# Altium PCB MB1136.PcbDoc (part 2 of 2)
Units mm, origin at the board's own origin, x right, y up, seen from the top; angles counter-clockwise.
Board outline 70 x 83 mm, 2 copper layers (Top Layer, Bottom Layer), stack 1.571 mm thick; 176 components, 154 nets, 599 pads, 425 vias.
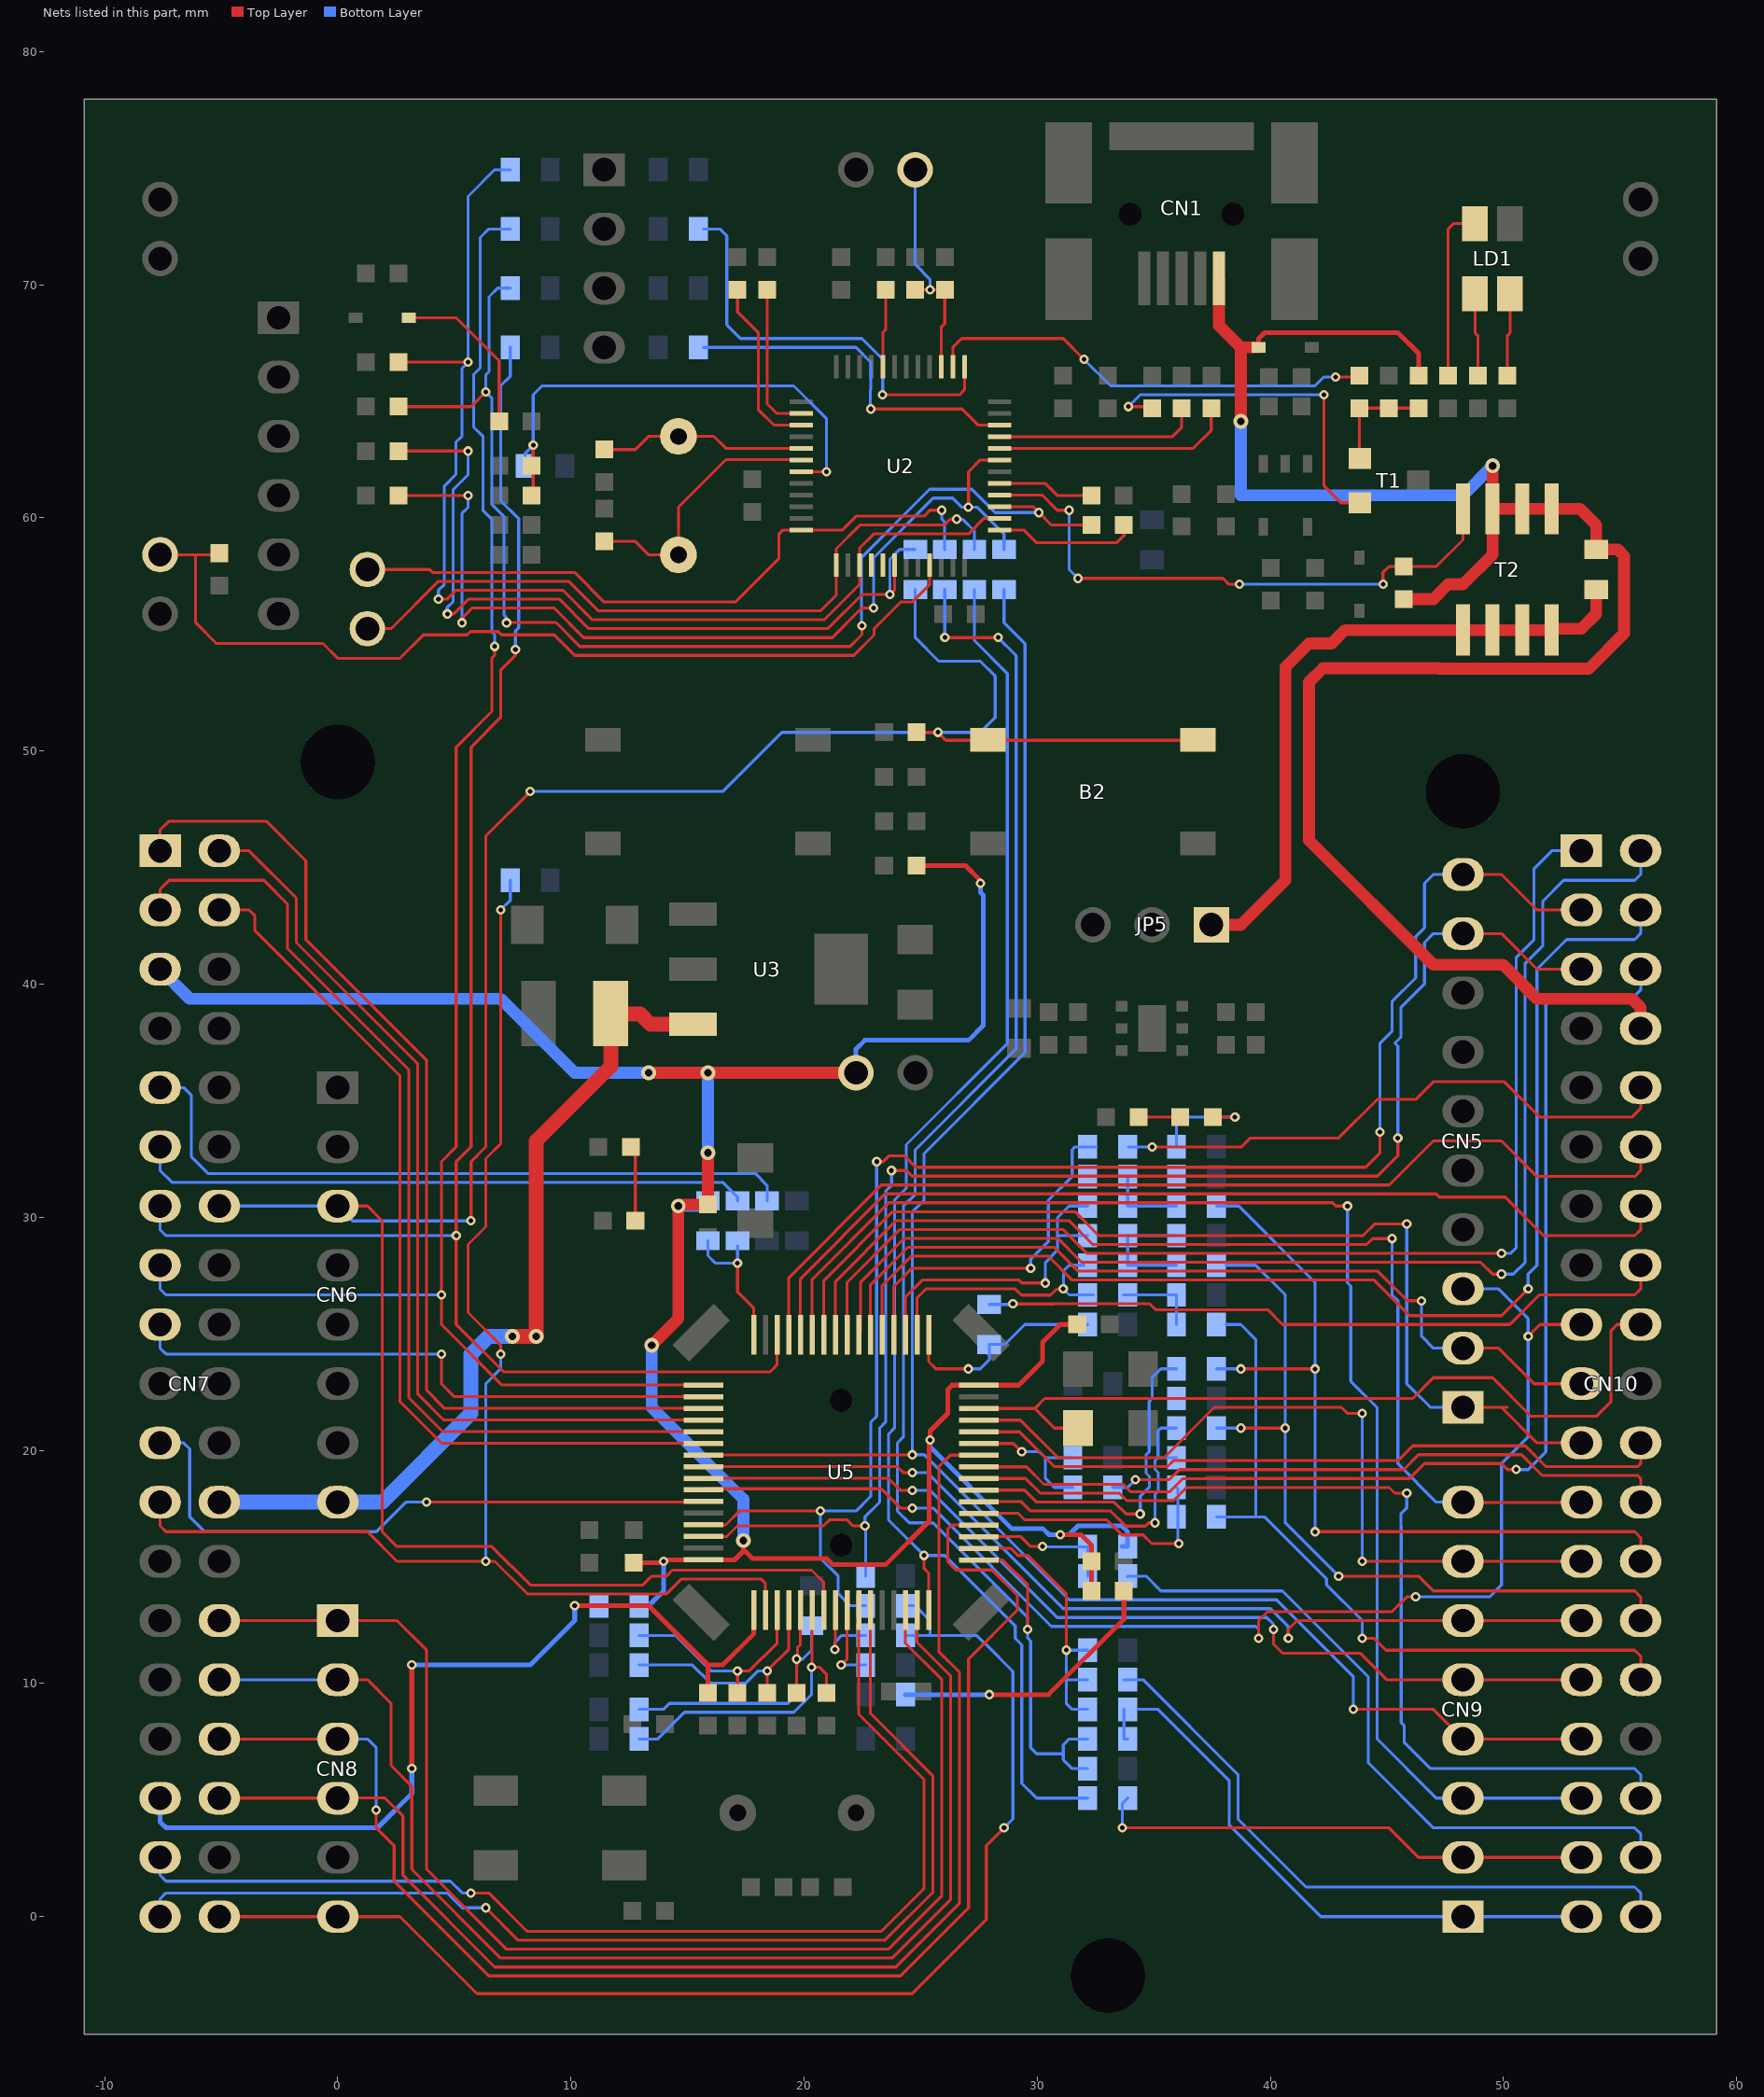
[diagram p2: the nets of this part, all layers, seen from the top]

## Via types
v1: diameter 0.406, hole 0.203, Top Layer to Bottom Layer, tented both sides, 399 vias
v2: diameter 0.635, hole 0.33, Top Layer to Bottom Layer, tented both sides, 26 vias

## Nets (pads, with @x,y where several pads share a name; then routed paths per layer and width w, separated by ;. In a path a pad name is that pad's centre, name@x,y a point inside that pad or via, vN(x,y) a via of type N, cw(c..) or ccw(c..) an arc to the next point about the centre after c; other vN are vias at no path point) (continued)
NetCN7_38: CN7.38 CN8.6 SB51.2 SB52.1 | length 53.9
  Top Layer w0.127: CN7.38@-5.08,0 CN8.6@0,0 2.667,0 5.969,-3.302 24.638,-3.302 27.813,-0.127 27.813,3.048 v1(28.575,3.81)
  Bottom Layer w0.127: SB51.2@24.352,12.065 25.4,12.065 ; SB52.1@24.352,13.335 24.765,13.335 25.4,12.7 25.4,12.065 ; v1(28.575,3.81) 28.956,4.191 28.956,10.515 27.787,11.684 27.782,11.684 27.401,12.065 25.4,12.065
NetCN10_26: CN10.26 SB25.2 SB36.2 | length 35.6
  Top Layer w0.127: v1(38.735,23.495) v1(41.91,23.495) ; v1(41.91,16.51) 55.626,16.51 55.88,16.256 CN10.26@55.88,15.24
  Bottom Layer w0.127: SB36.2@37.687,23.495 v1(38.735,23.495) ; SB25.2@37.687,30.48 38.639,30.48 41.91,27.209 v1(41.91,23.495) v1(41.91,16.51)
NetCN10_28: CN10.28 SB28.2 SB39.2 | length 33.4
  Top Layer w0.127: v1(38.735,20.955) v1(40.64,20.955) ; v1(42.926,14.605) 46.355,14.605 46.99,13.97 55.626,13.97 55.88,13.716 CN10.28@55.88,12.7
  Bottom Layer w0.127: SB39.2@37.687,20.955 v1(38.735,20.955) ; 38.1,27.94 39.37,27.94 40.64,26.67 v1(40.64,20.955) 40.64,16.891 v1(42.926,14.605)
NetCN10_30: CN10.30 SB35.1 SB44.1 | length 31.4
  Top Layer w0.127: v1(43.942,11.938) 44.45,11.938 44.958,11.43 55.626,11.43 55.88,11.176 CN10.30@55.88,10.16
  Bottom Layer w0.127: SB44.1@37.687,17.145 39.37,17.145 ; 38.1,25.4 38.735,25.4 39.37,24.765 39.37,17.145 ; v1(43.942,11.938) 43.942,12.7 42.405,14.237 42.405,14.491 39.751,17.145 39.37,17.145
NetD1_2: D1.2 R9.1 | length 7.2
  Top Layer w0.127: D1.2@3.048,68.58 5.08,68.58 6.921,66.739 R9.1@6.921,64.135
NetJP1_2: JP1.2 R4.1 R7.2 U2.39 | length 10
  Top Layer w0.127: R4.1@24.765,69.787 v1(25.4,69.787) R7.2@26.035,69.787 26.035,68.326 25.88,68.171 U2.39@25.88,66.48
  Bottom Layer w0.127: JP1.2@24.765,74.93 24.765,70.866 25.4,70.231 v1(25.4,69.787)
NetJP4_2: JP4.2 R26.2 U2.21 | length 40.8
  Top Layer w0.127: JP4.2@-7.62,58.42 -6.096,58.42 ; R26.2@-5.08,58.483 -5.143,58.42 -6.096,58.42 ; U2.21@25.38,57.98 25.38,57.13 24.638,56.388 24.143,56.388 23,55.245 23,54.973 22.129,54.102 10.16,54.102 9.284,54.978 7.023,54.978 6.884,55.118 5.689,55.118 5.55,54.978 3.67,54.978 2.667,53.975 0,53.975 -0.635,54.61 -5.207,54.61 -6.096,55.499 -6.096,58.42
NetJP5_1: JP5.1 SB1.2 T2.5 T2.6 T2.7 T2.8 | length 28.2
  Top Layer w0.508: JP5.1@37.465,42.545 38.735,42.545 40.64,44.45 40.64,53.594 41.656,54.61 42.627,54.61 43.202,55.185 T2.5@48.26,55.185 T2.6@49.53,55.185 T2.7@50.8,55.185 T2.8@52.07,55.185 52.13,55.245 53.34,55.245 53.975,55.88 SB1.2@53.975,56.737
NetL1_2: L1.2 SB57.1 | length 11.9
  Top Layer w0.203: v1(27.94,9.525) 30.48,9.525 33.719,12.763 L1.2@33.719,13.97
  Bottom Layer w0.203: SB57.1@24.352,9.525 v1(27.94,9.525)
NetLD1_2: LD1.2 R21.2 | length 3.6
  Top Layer w0.127: R21.2@50.165,66.103 50.165,67.818 50.28,67.933 LD1.2@50.28,69.62
NetLD1_3: LD1.3 R20.2 | length 3.6
  Top Layer w0.127: LD1.3@48.78,69.62 48.78,67.933 48.895,67.818 R20.2@48.895,66.103
NetLD1_4: LD1.4 R19.1 | length 7.5
  Top Layer w0.127: R19.1@47.625,66.103 47.625,72.39 47.855,72.62 LD1.4@48.78,72.62
NetLD2_1: LD2.1 R31.2 | length 1.8
  Top Layer w0.127: LD2.1@34.354,34.29 R31.2@36.132,34.29
NetLD3_1: LD3.1 R32.1 | length 3.3
  Top Layer w0.127: LD3.1@12.573,33.02 12.763,32.829 R32.1@12.763,29.845
NetR2_2: R2.2 U2.3 | length 7.6
  Top Layer w0.127: R2.2@17.145,69.787 17.145,68.834 18.034,67.945 18.034,64.643 18.697,63.98 U2.3@19.88,63.98
NetR3_2: R3.2 U2.2 | length 6.5
  Top Layer w0.127: R3.2@18.415,69.787 18.415,64.897 18.832,64.48 U2.2@19.88,64.48
NetR6_2: R6.2 U2.44 | length 3.4
  Top Layer w0.127: U2.44@23.38,66.48 23.38,67.957 23.495,68.072 R6.2@23.495,69.787
NetR10_2: R10.2 R11.1 R12.1 T1.2 | length 4.7
  Top Layer w0.127: T1.2@43.835,62.545 43.815,62.565 R11.1@43.815,64.706 R10.2@45.085,64.706 R12.1@46.355,64.706
NetR16_2: R16.2 T1.1 | length 15.4
  Top Layer w0.127: v1(33.909,64.77) 34.862,64.77 R16.2@34.925,64.706 ; v1(42.291,65.278) 42.291,61.387 43.033,60.645 T1.1@43.835,60.645
  Bottom Layer w0.127: v1(33.909,64.77) 34.417,65.278 v1(42.291,65.278)
NetR25_1: R25.1 U2.29 | length 4.2
  Top Layer w0.127: U2.29@28.38,61.48 30.341,61.48 30.861,60.96 R25.1@32.322,60.96
NetR28_2: R28.2 T2.4 U2.28 | length 25.4
  Top Layer w0.127: U2.28@28.38,60.98 30.206,60.98 30.861,60.325 v1(31.369,60.325) ; v1(31.75,57.404) 37.973,57.404 38.227,57.15 v1(38.672,57.15) ; v1(44.831,57.15) 44.831,57.658 45.085,57.912 R28.2@45.72,57.912 47.117,57.912 48.26,59.055 T2.4@48.26,60.385
  Bottom Layer w0.127: v1(31.369,60.325) 31.369,57.785 v1(31.75,57.404) ; v1(38.672,57.15) v1(44.831,57.15)
NetR31_1: R31.1 SB21.1 | length 4.5
  Top Layer w0.127: R31.1@37.529,34.29 v1(38.481,34.29)
  Bottom Layer w0.127: SB21.1@35.973,33.02 35.973,33.941 36.322,34.29 v1(38.481,34.29)
NetSB13_1: SB13.1 SB63.2 U5.16 | length 62.3
  Top Layer w0.127: v1(25.146,15.494) 25.146,14.929 25.343,14.732 U5.16@25.343,13.149
  Bottom Layer w0.127: SB13.1@27.305,56.928 27.305,54.737 28.715,53.327 28.715,37.447 24.384,33.116 24.384,31.242 23.876,30.734 23.876,20.955 23.622,20.701 23.622,17.018 v1(25.146,15.494) 26.035,15.494 29.057,12.472 29.057,11.938 29.337,11.658 29.337,5.715 29.972,5.08 SB63.2@32.163,5.08
NetSB14_1: SB14.1 SB61.2 SB62.2 U5.17 | length 66.3
  Top Layer w0.127: v1(26.035,54.864) v1(28.321,54.864) ; U5.17@27.491,15.297 28.518,15.297 29.591,14.224 v1(29.591,12.319)
  Bottom Layer w0.127: v1(26.035,54.864) SB14.1@26.035,56.928 ; v1(28.321,54.864) 29.096,54.089 29.096,37.224 24.765,32.893 24.765,30.988 24.257,30.48 24.257,20.574 24.003,20.32 24.003,17.399 24.511,16.891 25.527,16.891 29.591,12.827 v1(29.591,12.319) 29.591,11.943 29.718,11.816 29.718,7.239 29.972,6.985 31.115,6.985 ; SB61.2@32.163,6.35 31.496,6.35 31.115,6.731 31.115,6.985 ; SB62.2@32.163,7.62 31.369,7.62 31.115,7.366 31.115,6.985
NetSB18_1: SB18.1 SB19.1 U5.36 | length 15.9
  Top Layer w0.127: U5.36@23.843,24.952 23.843,27.018 24.638,27.813 v1(29.718,27.813)
  Bottom Layer w0.127: v1@29.753,27.848 v1(29.718,27.813) 29.718,28.194 30.48,28.956 30.48,30.734 31.496,31.75 ; SB19.1@32.163,31.75 31.496,31.75 ; SB18.1@32.544,33.02 SB18.1@32.163,33.02 31.623,33.02 31.496,32.893 31.496,31.75
NetSB22_1: SB22.1 SB23.1 U5.35 | length 13.8
  Top Layer w0.127: U5.35@24.343,24.952 24.343,26.582 25.067,27.305 29.215,27.305 29.342,27.178 v1(30.353,27.178)
  Bottom Layer w0.127: v1(30.353,27.178) 30.353,28.067 30.861,28.575 30.861,29.21 ; SB23.1@32.163,29.21 30.861,29.21 ; SB22.1@32.163,30.48 31.369,30.48 30.861,29.972 30.861,29.21
NetSB26_1: SB26.1 SB27.1 U5.34 | length 11.4
  Top Layer w0.127: U5.34@24.843,24.952 24.843,26.543 25.224,26.924 29.057,26.924 29.324,26.657 30.569,26.657 30.823,26.911 31.102,26.911 v1(31.115,26.924)
  Bottom Layer w0.127: SB26.1@32.004,27.94 31.369,27.94 31.128,27.699 31.128,26.937 v1(31.115,26.924) 31.369,26.67 SB27.1@32.163,26.67 SB27.1@32.417,26.67
NetSB30_2: SB30.2 SB31.2 U5.48 | length 6.1
  Top Layer w0.127: v1(17.145,28.035) 17.145,26.797 17.843,26.099 U5.48@17.843,24.951
  Bottom Layer w0.127: SB31.2@15.875,28.988 15.875,28.353 16.192,28.035 v1(17.145,28.035) SB30.2@17.145,28.766
NetSB34_1: SB34.1 SB37.1 U5.33 | length 9.3
  Top Layer w0.127: U5.33@25.343,24.952 25.343,23.806 25.654,23.495 v1(27.051,23.495)
  Bottom Layer w0.127: v1(27.051,23.495) 27.559,23.495 27.94,23.876 SB37.1@27.94,24.543 28.607,24.543 29.464,25.4 SB34.1@32.163,25.4
NetSB43_2: SB43.2 SB47.2 U5.19 | length 6.1
  Top Layer w0.127: U5.19@27.491,16.297 29.296,16.297 29.718,15.875 v1(30.226,15.875)
  Bottom Layer w0.127: v1(30.226,15.875) 30.239,15.862 32.15,15.862 SB43.2@32.163,15.875 SB47.2@32.163,14.605
NetSB53_1: SB53.1 SB58.1 SB59.1 U5.18 | length 12.1
  Top Layer w0.127: U5.18@27.491,15.797 28.877,15.797 29.179,15.494 29.591,15.494 31.242,13.843 v1(31.242,11.43)
  Bottom Layer w0.127: SB59.1@32.163,8.89 31.496,8.89 31.242,9.144 31.242,10.16 ; SB58.1@32.163,10.16 31.242,10.16 ; SB53.1@32.163,11.43 v1(31.242,11.43) 31.242,10.16
NetSB64_1: SB64.1 SB65.1 U5.27 | length 6.5
  Top Layer w0.127: U5.27@27.491,20.297 28.979,20.297 v1(29.337,19.939)
  Bottom Layer w0.127: v1(29.337,19.939) 30.099,19.939 30.353,19.685 ; SB64.1@31.528,18.415 30.734,18.415 30.353,18.796 30.353,19.685 ; SB65.1@31.528,19.685 30.353,19.685
NRST: B2.2 B2.3 C14.2 CN6.3 CN7.14 SB12.2 U5.7 | length 109
  Top Layer w0.127: CN6.3@0,30.48 1.27,30.48 1.905,29.845 1.905,16.51 2.54,15.875 6.604,15.875 8.255,14.224 13.081,14.224 13.462,14.605 14.097,14.605 14.351,14.859 20.32,14.859 20.843,14.336 U5.7@20.843,13.149 ; v1(5.715,29.845) 5.715,32.385 6.35,33.02 6.35,46.355 v1(8.255,48.26) ; C14.2@24.828,50.8 v1(25.74,50.8) 26.08,50.46 36.863,50.46 B2.3@36.885,50.483
  Bottom Layer w0.127: CN7.14@-5.08,30.48 CN6.3@0,30.48 0.635,29.845 v1(5.715,29.845) ; v1(8.255,48.26) 16.51,48.26 19.05,50.8 v1(25.74,50.8) 27.559,50.8 28.194,51.435 28.194,53.213 27.559,53.848 25.781,53.848 24.765,54.864 SB12.2@24.765,56.928
OSC_IN: C3.1 U2.5 X1.2 | length 8.9
  Top Layer w0.127: C3.1@11.43,62.928 12.763,62.928 13.326,63.491 16.138,63.491 16.649,62.98 U2.5@19.88,62.98
OSC_OUT: C8.1 U2.6 X1.1 | length 11.6
  Top Layer w0.127: C8.1@11.43,58.991 12.763,58.991 13.344,58.411 X1.1@14.61,58.411 14.61,60.457 16.65,62.497 19.863,62.497 U2.6@19.88,62.48
PA0: CN7.28 CN8.1 U5.14 | length 56.2
  Top Layer w0.127: CN7.28@-5.08,12.7 CN8.1@0,12.7 2.54,12.7 3.81,11.43 3.81,2.032 7.239,-1.397 23.617,-1.397 25.908,0.894 25.908,10.16 24.343,11.725 U5.14@24.343,13.149
PA1: CN7.30 CN8.2 U5.15 | length 54
  Top Layer w0.127: CN8.2@0,10.16 1.27,10.16 2.286,9.144 2.286,6.477 3.175,5.588 3.175,2.032 6.985,-1.778 23.775,-1.778 26.289,0.736 26.289,10.318 24.843,11.763 U5.15@24.843,13.149
  Bottom Layer w0.127: CN7.30@-5.08,10.16 CN8.2@0,10.16
PA2: CN9.2 CN10.35 SB63.1 | length 21.6
  Top Layer w0.127: v1(33.655,3.81) 45.085,3.81 46.355,2.54 CN9.2@48.26,2.54 CN10.35@53.34,2.54
  Bottom Layer w0.127: v1(33.655,3.81) 33.655,4.858 SB63.1@33.877,5.08
PA3: CN9.1 CN10.37 SB59.2 SB62.1 | length 25.2
  Bottom Layer w0.127: SB59.2@33.719,8.89 33.719,7.62 SB62.1@33.877,7.62 ; 34.338,8.89 35.179,8.89 38.227,5.842 38.227,3.937 42.164,0 CN9.1@48.26,0 CN10.37@53.34,0
PA4: CN7.32 CN8.3 U5.20 | length 61.1
  Top Layer w0.127: CN7.32@-5.08,7.62 CN8.3@0,7.62 ; v1(1.651,4.572) 1.651,3.81 2.413,3.048 2.413,1.524 6.477,-2.54 24.13,-2.54 27.051,0.381 27.051,11.049 29.145,13.143 29.145,13.781 28.057,14.869 26.51,14.869 26.162,15.217 26.162,16.637 26.322,16.797 U5.20@27.491,16.797
  Bottom Layer w0.127: CN8.3@0,7.62 1.27,7.62 1.651,7.239 v1(1.651,4.572)
PA5: SB42.1 SB44.2 U5.21 | length 11.6
  Top Layer w0.127: U5.21@27.491,17.297 29.185,17.297 29.464,17.018 32.989,17.018 33.637,16.37 34.544,16.37 34.912,16.002 v1(36.068,16.002) v1@36.081,15.989
  Bottom Layer w0.127: SB42.1@35.973,18.415 36.036,18.352 36.036,16.034 v1(36.068,16.002)
PA6: SB39.1 SB41.1 U5.22 | length 13.8
  Top Layer w0.127: U5.22@27.491,17.797 29.32,17.797 29.718,17.399 33.147,17.399 33.795,16.751 34.633,16.751 34.772,16.891 v1(35.052,16.891)
  Bottom Layer w0.127: v1(35.052,16.891) 35.052,18.117 35.192,18.257 35.192,19.042 35.052,19.182 35.052,19.558 35.179,19.685 ; SB41.1@35.973,19.685 35.179,19.685 ; SB39.1@35.973,20.955 35.306,20.955 35.179,20.828 35.179,19.685
PA7: SB36.1 SB40.1 U5.23 | length 15.8
  Top Layer w0.127: U5.23@27.491,18.297 29.455,18.297 29.972,17.78 33.305,17.78 33.813,17.272 v1(34.417,17.272)
  Bottom Layer w0.127: v1(34.417,17.272) 34.417,18.034 34.798,18.415 34.811,18.415 34.811,18.885 34.671,19.024 34.671,19.812 34.798,19.939 34.798,22.098 34.925,22.225 ; SB40.1@35.973,22.225 34.925,22.225 ; SB36.1@35.973,23.495 35.306,23.495 34.925,23.114 34.925,22.225
PA8: CN9.8 CN10.23 U5.41 | length 46.1
  Top Layer w0.127: U5.41@21.343,24.952 21.343,27.247 23.954,29.858 31.356,29.858 32.385,28.829 44.131,28.829 44.385,29.083 v1(45.212,29.083) ; CN9.8@48.26,17.78 48.273,17.767 53.327,17.767 CN10.23@53.34,17.78
  Bottom Layer w0.127: v1(45.212,29.083) 45.212,26.67 45.466,26.416 45.466,19.431 47.117,17.78 CN9.8@48.26,17.78
PA9: CN5.1 CN10.21 U5.42 | length 44.3
  Top Layer w0.127: U5.42@20.843,24.952 20.843,27.286 23.796,30.239 31.61,30.239 32.639,29.21 43.973,29.21 44.481,29.718 v1(45.847,29.718) ; CN5.1@48.514,21.844 50.165,21.844 ; 49.911,21.844 51.435,20.32 CN10.21@53.34,20.32
  Bottom Layer w0.127: v1(45.847,29.718) 45.847,22.86 46.863,21.844 CN5.1@48.006,21.844
PA10: CN9.3 CN10.33 U5.43 | length 60
  Top Layer w0.127: U5.43@20.343,24.952 20.343,27.328 23.635,30.62 42.672,30.62 42.812,30.48 v1(43.307,30.48)
  Bottom Layer w0.127: v1(43.307,30.48) 43.307,27.191 43.447,27.051 43.447,22.962 44.577,21.831 44.577,7.62 47.117,5.08 CN9.3@48.26,5.08 CN10.33@53.34,5.08
PA11: CN10.14 U5.44 | length 41.8
  Top Layer w0.127: U5.44@19.843,24.952 19.843,27.367 23.477,31.001 47.104,31.001 47.244,30.861 50.069,30.861 51.72,29.21 55.626,29.21 55.88,29.464 CN10.14@55.88,30.48
PA12: CN10.12 U5.45 | length 43.2
  Top Layer w0.127: U5.45@19.343,24.952 19.343,27.406 23.319,31.382 45.098,31.382 46.99,33.274 49.911,33.274 51.435,31.75 55.626,31.75 55.88,32.004 CN10.12@55.88,33.02
PA13: CN7.13 SB9.1 U5.46 | length 73.3
  Top Layer w0.127: v1(7.62,54.356) 7.62,54.102 6.985,53.467 6.985,51.435 5.715,50.165 5.715,33.02 5.08,32.385 v1(5.08,29.21) 5.08,25.4 7.112,23.368 18.542,23.368 18.843,23.669 U5.46@18.843,24.952
  Bottom Layer w0.127: CN7.13@-7.62,30.48 -7.62,29.464 -7.366,29.21 v1(5.08,29.21) ; SB9.1@7.398,67.31 7.398,66.072 6.985,65.659 6.985,60.737 7.76,59.962 7.76,55.283 7.62,55.144 v1(7.62,54.356)
PA14: CN7.15 SB5.1 U5.49 | length 75
  Top Layer w0.127: v1(6.731,54.483) 6.731,54.102 6.604,53.975 6.604,51.689 5.08,50.165 5.08,33.02 4.445,32.385 v1(4.445,26.67) 4.445,25.4 7.042,22.803 U5.49@15.688,22.803
  Bottom Layer w0.127: CN7.15@-7.62,27.94 -7.62,26.924 -7.366,26.67 v1(4.445,26.67) ; v1(6.731,54.483) 6.731,54.991 6.604,55.118 6.604,59.944 6.223,60.325 6.223,63.5 5.829,63.894 5.829,66.154 6.109,66.434 6.109,72.022 6.477,72.39 SB5.1@7.398,72.39
PA15: CN7.17 U5.50 | length 25.9
  Top Layer w0.127: v1(4.445,24.13) 4.445,22.86 5.002,22.303 U5.50@15.688,22.303
  Bottom Layer w0.127: CN7.17@-7.62,25.4 -7.62,24.384 -7.366,24.13 v1(4.445,24.13)
PB0: CN7.34 CN8.4 U5.26 | length 58.4
  Top Layer w0.127: CN7.34@-5.08,5.08 CN8.4@0,5.08 0.013,5.093 2.019,5.093 2.794,4.318 2.794,1.778 6.731,-2.159 23.932,-2.159 26.67,0.579 26.67,10.476 25.781,11.365 25.781,19.304 26.274,19.797 U5.26@27.491,19.797
PB1: CN10.24 SB64.2 | length 24.7
  Top Layer w0.127: v1(34.214,18.745) 35.667,18.745 36.099,19.177 45.72,19.177 46.355,19.812 50.769,19.812 51.658,18.923 55.753,18.923 55.88,18.796 CN10.24@55.88,17.78
  Bottom Layer w0.127: SB64.2@33.242,18.415 33.884,18.415 v1(34.214,18.745)
PB2: CN10.22 U5.28 | length 30.7
  Top Layer w0.127: U5.28@27.491,20.797 29.241,20.797 30.734,19.304 35.591,19.304 35.845,19.558 45.466,19.558 46.101,20.193 50.927,20.193 51.816,19.304 55.753,19.304 55.88,19.431 CN10.22@55.88,20.32
PB3: CN9.4 CN10.31 SB15.2 U5.55 | length 83
  Top Layer w0.127: U5.55@15.688,19.803 24.629,19.803 v1(24.638,19.812) ; v1(43.561,8.89) 46.99,8.89 CN9.4@48.26,7.62 CN10.31@53.34,7.62
  Bottom Layer w0.127: SB15.2@28.575,56.928 28.575,55.499 29.477,54.597 29.477,37.066 25.146,32.735 25.146,30.734 24.638,30.226 v1(24.638,19.812) 25.146,19.812 31.369,13.589 40.259,13.589 43.561,10.287 v1(43.561,8.89)
PB4: CN9.6 CN10.27 U5.56 | length 41.5
  Top Layer w0.127: U5.56@15.688,19.303 24.003,19.303 24.256,19.05 v1(24.638,19.05) ; v1(40.767,11.938) 40.767,12.319 41.148,12.7 CN9.6@48.26,12.7 CN10.27@53.34,12.7
  Bottom Layer w0.127: v1(24.638,19.05) 25.273,19.05 31.115,13.208 40.005,13.208 40.767,12.446 v1(40.767,11.938)
PB5: CN9.5 CN10.29 U5.57 | length 41.7
  Top Layer w0.127: U5.57@15.688,18.803 23.615,18.803 24.13,18.288 v1(24.638,18.288) ; v1(40.132,12.319) 40.132,11.684 40.513,11.303 43.841,11.303 44.984,10.16 CN9.5@48.26,10.16 CN10.29@53.34,10.16
  Bottom Layer w0.127: v1(24.638,18.288) 25.4,18.288 30.861,12.827 39.847,12.827 40.132,12.542 v1(40.132,12.319)
PB6: CN5.3 CN10.17 U5.58 | length 56.2
  Top Layer w0.127: U5.58@15.688,18.303 15.737,18.352 23.304,18.352 24.13,17.526 v1(24.638,17.526) ; v1(39.497,11.938) 39.497,12.7 39.878,13.081 45.212,13.081 45.847,13.716 v1(46.228,13.716) ; v1(51.054,24.892) 51.562,25.4 CN10.17@53.34,25.4
  Bottom Layer w0.127: v1(24.638,17.526) 25.527,17.526 30.607,12.446 39.37,12.446 39.497,12.319 v1(39.497,11.938) ; v1(46.228,13.716) 49.403,13.716 49.911,14.224 49.911,19.431 51.054,20.574 v1(51.054,24.892) 51.054,25.654 49.784,26.924 CN5.3@48.26,26.924
PB7: CN7.21 U5.59 | length 27
  Top Layer w0.127: v1@3.937,17.78 15.665,17.78 U5.59@15.688,17.803
  Bottom Layer w0.127: CN7.21@-7.62,20.32 -6.604,20.32 -6.35,20.066 -6.35,17.145 -5.715,16.51 1.651,16.51 2.921,17.78 v1(3.81,17.78)
PB8: CN5.10 CN10.3 SB52.2 U5.61 | length 69.4
  Top Layer w0.127: U5.61@15.688,16.803 16.637,16.803 17.232,17.399 v1(20.701,17.399) ; v1(23.114,32.385) 23.394,32.385 23.648,32.639 24.301,32.639 24.796,32.144 44.082,32.144 44.704,32.766 v1(44.704,33.655) ; CN5.10@48.26,44.704 49.911,44.704 51.435,43.18 CN10.3@53.34,43.18
  Bottom Layer w0.127: SB52.2@22.638,13.335 21.971,13.335 21.463,13.843 21.463,14.605 20.701,15.367 v1(20.701,17.399) 22.225,17.399 22.86,18.034 22.86,21.209 23.114,21.463 v1(23.114,32.385) ; v1(44.704,33.655) 44.704,37.465 45.212,37.973 45.212,39.243 46.228,40.259 46.228,42.037 46.609,42.418 46.609,44.323 46.99,44.704 CN5.10@48.26,44.704
PB9: CN5.9 CN10.5 SB46.2 U5.62 | length 64.6
  Top Layer w0.127: U5.62@15.688,16.304 16.675,16.304 17.136,16.764 20.828,16.764 21.082,17.018 21.844,17.018 22.098,16.764 v1(22.61,16.764) ; v1(23.749,32.004) 24.397,32.004 24.638,31.763 44.59,31.763 45.466,32.639 v1(45.466,33.401) ; CN5.9@48.26,42.164 49.911,42.164 51.435,40.64 CN10.5@53.34,40.64
  Bottom Layer w0.127: SB46.2@22.638,14.605 22.638,16.736 v1(22.61,16.764) 22.61,17.149 23.241,17.78 23.241,20.955 23.495,21.209 23.495,31.115 23.749,31.369 v1(23.749,32.004) ; v1(45.466,33.401) 45.466,37.338 45.339,37.465 45.593,37.719 45.593,38.989 46.609,40.005 46.609,41.783 46.99,42.164 CN5.9@48.26,42.164
PB10: CN9.7 CN10.25 U5.29 | length 33.9
  Top Layer w0.127: U5.29@27.491,21.297 29.28,21.297 30.892,19.685 35.433,19.685 37.592,21.844 43.053,21.844 43.307,21.59 v1(43.942,21.59) ; v1(43.942,15.24) CN9.7@48.26,15.24 CN10.25@53.34,15.24
  Bottom Layer w0.127: v1(43.942,15.24) v1(43.942,21.59)
PB11: C26.1 CN10.18 U5.30 | length 34.9
  Top Layer w0.127: U5.30@27.491,21.797 29.892,21.797 ; C26.1@31.369,20.955 30.734,20.955 29.892,21.797 ; CN10.18@55.88,25.4 54.864,25.4 54.61,25.146 54.61,22.098 53.975,21.463 51.181,21.463 49.53,23.114 46.99,23.114 46.101,22.225 30.321,22.225 29.892,21.797
PB12: CN10.16 SB37.2 | length 30
  Top Layer w0.127: v1(28.956,26.289) 28.969,26.276 30.726,26.276 30.739,26.289 34.824,26.289 35.078,26.035 39.878,26.035 40.513,25.4 50.266,25.4 51.536,26.67 55.626,26.67 55.88,26.924 CN10.16@55.88,27.94
  Bottom Layer w0.127: SB37.2@27.94,26.257 28.924,26.257 v1(28.956,26.289)
PB13: SB27.2 SB29.2 SB35.2 | length 3.6
  Bottom Layer w0.127: SB27.2@33.687,26.67 SB27.2@33.877,26.67 SB29.2@35.973,26.67 SB35.2@35.973,25.4
PB14: SB23.2 SB24.2 SB26.2 SB28.1 | length 5.5
  Bottom Layer w0.127: SB28.1@35.973,27.94 SB26.2@33.877,27.94 SB23.2@33.877,29.21 SB24.2@35.973,29.21
PB15: SB19.2 SB20.2 SB22.2 SB25.1 | length 5.5
  Bottom Layer w0.127: SB25.1@35.973,30.48 SB22.2@33.877,30.48 SB19.2@33.877,31.75 SB20.2@35.973,31.75
PC0: SB51.1 U5.8 | length 3.5
  Top Layer w0.127: v1(21.323,11.455) 21.343,11.476 U5.8@21.343,13.149
  Bottom Layer w0.127: v1(21.323,11.455) 21.323,11.772 21.615,12.065 SB51.1@22.638,12.065
PC1: SB56.1 U5.9 | length 3.9
  Top Layer w0.127: v1(21.59,10.795) 21.843,11.048 U5.9@21.843,13.149
  Bottom Layer w0.127: v1(21.59,10.795) SB56.1@22.638,10.795 22.225,10.795
PC2: CN7.35 U5.10 | length 48.4
  Top Layer w0.127: v1(5.715,1.016) 6.477,1.016 8.128,-0.635 23.301,-0.635 25.146,1.21 25.146,5.873 22.343,8.675 U5.10@22.343,13.149
  Bottom Layer w0.127: CN7.35@-7.62,2.54 -7.62,1.778 -7.366,1.524 4.826,1.524 5.334,1.016 v1(5.715,1.016)
PC3: CN7.37 U5.11 | length 48.9
  Top Layer w0.127: v1(6.35,0.381) 7.747,-1.016 23.459,-1.016 25.527,1.052 25.527,6.031 22.843,8.714 U5.11@22.843,13.149
  Bottom Layer w0.127: CN7.37@-7.62,0 -7.62,0.762 -7.366,1.016 4.699,1.016 5.334,0.381 v1(6.35,0.381)
PC4: CN10.34 U5.24 | length 40.9
  Top Layer w0.127: U5.24@27.491,18.797 29.494,18.797 30.13,18.161 33.523,18.161 33.84,17.844 35.843,17.844 36.402,18.402 45.098,18.402 45.339,18.161 v1(45.847,18.161)
  Bottom Layer w0.127: v1(45.847,18.161) 45.847,17.526 45.593,17.272 45.593,16.764 45.606,16.751 45.606,8.327 45.733,8.2 45.733,7.48 46.863,6.35 55.626,6.35 55.88,6.096 55.88,5.842
PC5: CN10.6 U5.25 | length 50.1
  Top Layer w0.127: U5.25@27.491,19.297 29.533,19.297 30.288,18.542 33.686,18.542 33.693,18.535 33.693,18.53 33.998,18.225 35.685,18.225 36.244,18.783 37.198,18.783 37.211,18.796 45.974,18.796 46.609,19.431 49.911,19.431 50.165,19.177 v1(50.546,19.177)
  Bottom Layer w0.127: v1(50.546,19.177) 51.054,19.177 51.816,19.939 51.816,39.116 52.07,39.37 55.499,39.37 55.88,39.751 CN10.6@55.88,40.64
PC6: CN10.4 U5.37 | length 51.8
  Top Layer w0.127: U5.37@23.343,24.952 23.343,27.057 24.62,28.334 30.467,28.334 31.496,27.305 44.45,27.305 45.974,25.781 49.911,25.781 v1(51.054,26.924)
  Bottom Layer w0.127: v1(51.054,26.924) 51.054,27.559 51.435,27.94 51.435,40.64 52.705,41.91 55.626,41.91 55.88,42.164 CN10.4@55.88,43.18
PC7: CN5.2 CN10.19 U5.38 | length 36.6
  Top Layer w0.127: U5.38@22.843,24.952 22.843,27.096 24.462,28.715 30.721,28.715 31.75,27.686 44.608,27.686 45.878,26.416 v1(46.482,26.416) ; CN5.2@48.26,24.384 49.784,24.384 51.308,22.86 CN10.19@53.34,22.86
  Bottom Layer w0.127: v1(46.482,26.416) 46.482,24.892 46.99,24.384 CN5.2@48.26,24.384
PC8: CN10.2 U5.39 | length 53.9
  Top Layer w0.127: U5.39@22.343,24.952 22.416,25.024 22.416,27.207 24.304,29.096 30.879,29.096 31.908,28.067 49.022,28.067 49.53,27.559 v1(49.911,27.559)
  Bottom Layer w0.127: v1(49.911,27.559) 50.419,27.559 50.927,28.067 50.927,40.894 51.689,41.656 51.689,43.561 52.578,44.45 55.626,44.45 55.88,44.704 CN10.2@55.88,45.72
PC9: CN10.1 U5.40 | length 51.3
  Top Layer w0.127: U5.40@21.843,24.952 21.843,27.208 24.112,29.477 31.102,29.477 32.131,28.448 v1(49.911,28.448)
  Bottom Layer w0.127: v1(49.911,28.448) 50.292,28.448 50.546,28.702 50.546,41.148 51.308,41.91 51.308,44.958 52.07,45.72 CN10.1@53.34,45.72
PC10: CN7.1 U5.51 | length 45.1
  Top Layer w0.127: CN7.1@-7.62,45.72 -7.62,46.609 -7.239,46.99 -3.074,46.99 -1.366,45.283 -1.366,41.91 3.81,36.734 3.81,22.571 4.578,21.803 U5.51@15.688,21.803
PC11: CN7.2 U5.52 | length 40.3
  Top Layer w0.127: CN7.2@-5.08,45.72 -3.81,45.72 -1.778,43.688 -1.778,41.783 3.429,36.576 3.429,22.414 4.539,21.303 U5.52@15.688,21.303
PC12: CN7.3 U5.53 | length 43.5
  Top Layer w0.127: CN7.3@-7.62,43.18 -7.62,44.069 -7.239,44.45 -3.175,44.45 -2.159,43.434 -2.159,41.529 3.048,36.322 3.048,22.256 4.5,20.803 U5.53@15.688,20.803
PC13: CN7.23 SB17.1 U5.2 | length 60.5
  Top Layer w0.127: CN7.23@-7.62,17.78 -7.62,16.764 -7.366,16.51 1.27,16.51 2.54,15.24 v1(6.35,15.24) 6.731,15.24 8.128,13.843 14.097,13.843 14.732,14.478 18.161,14.478 18.343,14.296 U5.2@18.343,13.149 ; v1(6.985,24.13) 6.985,24.511 5.588,25.908 5.588,28.829 6.35,29.591 6.35,32.512 6.985,33.147 v1(6.985,43.18)
  Bottom Layer w0.127: v1(6.35,15.24) 6.35,22.86 6.985,23.495 v1(6.985,24.13) ; v1(6.985,43.18) 7.398,43.593 SB17.1@7.398,44.45
PC14: R34.2 SB49.2 U5.3 | length 9.4
  Top Layer w0.127: R34.2@17.145,9.588 v1(17.145,10.541) 17.653,10.541 18.843,11.731 U5.3@18.843,13.149
  Bottom Layer w0.127: SB49.2@12.922,12.065 14.478,12.065 16.002,10.541 v1(17.145,10.541)
PC15: R36.2 SB48.2 U5.4 | length 10
  Top Layer w0.127: R36.2@18.415,9.588 v1(18.415,10.541) 19.343,11.469 U5.4@19.343,13.149
  Bottom Layer w0.127: SB48.2@12.922,10.795 15.209,10.795 15.984,10.02 17.513,10.02 18.034,10.541 v1(18.415,10.541)
PD2: CN7.4 U5.54 | length 38.8
  Top Layer w0.127: CN7.4@-5.08,43.18 -3.81,43.18 -3.556,42.926 -3.556,42.291 2.667,36.068 2.667,22.098 4.462,20.303 U5.54@15.688,20.303
PD8: CN10.10 SB18.2 | length 24.8
  Top Layer w0.127: v1(34.925,33.02) 38.761,33.02 39.142,33.401 42.926,33.401 44.577,35.052 46.228,35.052 46.99,35.814 50.038,35.814 51.562,34.29 55.499,34.29 55.88,34.671 CN10.10@55.88,35.56
  Bottom Layer w0.127: SB18.2@33.909,33.02 v1(34.925,33.02)
PF0: R35.1 SB50.2 SB55.2 U5.5 | length 14
  Top Layer w0.127: R35.1@19.685,9.588 19.685,10.795 19.724,10.834 19.724,11.557 19.843,11.676 U5.5@19.843,13.149
  Bottom Layer w0.127: SB55.2@12.922,8.89 13.97,8.89 14.224,9.144 19.304,9.144 19.685,9.525 v1(19.685,11.049) 19.939,11.049 20.32,11.43 SB50.2@20.32,12.478
PF1: R37.1 SB54.2 U5.6 | length 13.4
  Top Layer w0.127: U5.6@20.343,13.149 20.343,10.717 v1(20.32,10.694) 20.675,10.694 20.955,10.414 R37.1@20.955,9.588
  Bottom Layer w0.127: SB54.2@12.922,7.62 13.722,7.62 14.865,8.763 19.558,8.763 20.32,9.525 v1(20.32,10.694)
PF4: CN10.38 SB58.2 | length 28.1
  Bottom Layer w0.127: SB58.2@33.719,10.16 SB58.2@33.877,10.16 34.544,10.16 38.608,6.096 38.608,4.191 41.529,1.27 55.626,1.27 55.88,1.016 CN10.38@55.88,0
PF5: CN10.36 SB47.1 | length 29.8
  Bottom Layer w0.127: SB47.1@33.877,14.59 SB47.1@33.877,14.605 34.671,14.605 35.306,13.97 40.513,13.97 44.196,10.287 44.196,6.604 46.99,3.81 55.626,3.81 55.88,3.556 CN10.36@55.88,2.54
PF6: CN7.9 SB32.2 | length 30
  Bottom Layer w0.127: CN7.9@-7.62,35.56 -6.604,35.56 -6.286,35.243 -6.286,32.599 -5.564,31.877 17.907,31.877 18.415,31.369 SB32.2@18.415,30.702
PF7: CN7.11 SB30.1 | length 26.4
  Bottom Layer w0.127: CN7.11@-7.62,33.02 -7.62,32.004 -7.112,31.496 16.51,31.496 17.145,30.861 SB30.1@17.145,30.702
STLINK_RX: CN3.1 SB13.2 U2.13 | length 31.2
  Top Layer w0.127: CN3.1@1.27,55.245 2.286,55.245 4.318,57.277 9.906,57.277 11.176,56.007 20.701,56.007 21.38,56.686 U2.13@21.38,57.98 21.38,58.674 22.396,59.69 26.009,59.69 26.263,59.944 v1(26.543,59.944)
  Bottom Layer w0.127: v1(26.543,59.944) 26.556,59.931 26.81,59.931 27.305,59.436 SB13.2@27.305,58.642
STLINK_TX: CN3.2 SB14.2 U2.12 | length 29.2
  Top Layer w0.127: CN3.2@1.27,57.785 3.937,57.785 4.064,57.658 10.16,57.658 11.43,56.388 17.048,56.388 18.923,58.263 18.923,59.309 19.094,59.48 U2.12@19.88,59.48 21.647,59.48 22.238,60.071 25.146,60.071 25.4,60.325 v1(25.908,60.325)
  Bottom Layer w0.127: v1(25.908,60.325) 25.908,59.944 26.022,59.83 26.022,58.655 SB14.2@26.035,58.642
STM_JTCK: SB6.2 U2.37 | length 18.4
  Top Layer w0.127: v1(23.368,65.278) 26.67,65.278 26.88,65.488 U2.37@26.88,66.48 ; U2.37@26.924,66.48 U2.37@26.924,66.548
  Bottom Layer w0.127: SB6.2@15.684,72.39 16.383,72.39 16.685,72.088 16.685,68.278 17.272,67.691 22.479,67.691 23.368,66.802 v1(23.368,65.278)
STM_JTMS: SB10.2 U2.34 | length 15.3
  Top Layer w0.127: v1(22.86,64.669) 26.771,64.669 27.46,63.98 U2.34@28.38,63.98
  Bottom Layer w0.127: SB10.2@15.684,67.31 22.225,67.31 22.86,66.675 22.86,65.506 22.847,65.494 22.847,64.681 v1(22.86,64.669)
STM_RST: C6.2 R14.1 SB11.2 U2.7 | length 23
  Top Layer w0.127: C6.2@8.319,60.96 8.382,61.023 R14.1@8.382,62.23 ; R14.1@8.382,61.976 R14.1@8.382,62.23 ; v1(8.382,63.119) R14.1@8.382,62.23 ; U2.7@19.812,61.976 v1(20.955,61.976)
  Bottom Layer w0.127: SB11.2@8.033,62.23 8.033,62.77 v1(8.382,63.119) ; SB11.2@8.382,62.484 8.382,65.278 8.763,65.659 19.558,65.659 20.955,64.262 v1(20.955,61.976)
T_JTCK: R5.2 SB3.1 U2.15 U2.26 | length 50.5
  Top Layer w0.127: R5.2@2.603,66.675 v1(5.588,66.675) ; v1(4.318,56.515) 4.699,56.515 5.08,56.896 9.652,56.896 10.922,55.626 20.859,55.626 22.38,57.147 U2.15@22.38,57.98 22.38,58.702 22.987,59.309 27.051,59.309 27.722,59.98 U2.26@28.38,59.98
  Bottom Layer w0.127: v1(4.318,56.515) 4.318,56.896 4.572,57.15 4.572,61.372 5.067,61.867 5.067,63.246 5.334,63.513 5.334,66.421 v1(5.588,66.675) 5.588,73.787 6.731,74.93 SB3.1@7.398,74.93
T_JTDI: U2.17
T_JTDO: U2.16
T_JTMS: R8.2 R24.2 SB7.1 U2.27 | length 52.3
  Top Layer w0.127: R8.2@2.603,64.77 5.715,64.77 v1(6.35,65.405) ; v1(7.239,55.499) 7.252,55.512 9.354,55.512 10.383,54.483 21.971,54.483 22.479,54.991 v1(22.479,55.372) ; U2.27@28.38,60.48 29.817,60.48 v1(30.071,60.226) 30.607,59.69 R24.2@32.322,59.69 ; R24.2@32.512,59.563 R24.2@32.639,59.563
  Bottom Layer w0.127: v1(7.239,55.499) 7.224,55.514 7.224,55.738 7.125,55.836 7.125,60.058 6.604,60.579 6.604,65.151 v1(6.35,65.405) 6.35,66.136 6.49,66.276 6.49,69.482 6.858,69.85 SB7.1@7.398,69.85 ; v1(22.479,55.372) 22.466,55.385 22.466,58.311 25.382,61.227 27.196,61.227 28.197,60.226 v1(30.071,60.226)
T_NRST: R13.2 SB12.1 U2.18 | length 34.8
  Top Layer w0.127: R13.2@2.603,62.865 v1(5.588,62.865) ; v1(4.699,55.88) 4.979,55.88 5.614,56.515 9.494,56.515 10.764,55.245 21.017,55.245 22.479,56.708 v1(23.688,56.708) 23.88,56.9 U2.18@23.88,57.98
  Bottom Layer w0.127: v1(4.699,55.88) 4.699,56.16 4.953,56.414 4.953,61.214 5.588,61.849 v1(5.588,62.865) ; v1(23.688,56.708) 23.688,58.232 24.098,58.642 SB12.1@24.765,58.642
T_SWDIO_IN: R24.1 U2.25 | length 6.1
  Top Layer w0.127: U2.25@28.38,59.48 29.42,59.48 29.972,58.928 33.401,58.928 33.719,59.245 R24.1@33.719,59.69
T_SWO: R22.2 SB15.1 U2.31 | length 40.8
  Top Layer w0.127: R22.2@2.603,60.96 v1(5.588,60.96) ; v1(5.334,55.499) 5.334,55.697 5.771,56.134 9.271,56.134 10.541,54.864 21.209,54.864 22.479,56.134 v1(22.987,56.134) ; v1(27.051,60.452) 27.051,61.976 27.555,62.48 U2.31@28.38,62.48
  Bottom Layer w0.127: v1(5.334,55.499) 5.334,60.198 5.588,60.452 v1(5.588,60.96) ; v1(22.987,56.134) 22.987,58.293 25.54,60.846 26.378,60.846 26.771,60.452 v1(27.051,60.452) 27.432,60.452 28.575,59.309 SB15.1@28.575,58.642
U5V: CN1.1 CN10.8 D2.1 R12.2 R28.1 SB1.1 T2.1 T2.2 T2.3 | length 88.4
  Top Layer w0.203: D2.1@39.497,67.31 39.497,67.691 39.751,67.945 45.466,67.945 46.355,67.056 R12.2@46.355,66.103
  Top Layer w0.508: CN1.1@37.792,70.275 37.792,68.253 38.735,67.31 ; v2(38.735,64.135) 38.735,67.31 ; D2.1@39.497,67.31 38.735,67.31 ; R28.1@45.72,56.515 46.99,56.515 47.625,57.15 48.26,57.15 49.53,58.42 T2.3@49.53,60.385 ; v2(49.53,62.23) T2.3@49.53,60.385 ; SB1.1@53.975,58.642 54.896,58.642 55.169,58.369 55.169,55.042 53.659,53.532 47.244,53.532 47.223,53.552 42.249,53.552 41.656,52.959 41.656,46.165 46.99,40.831 49.975,40.831 51.435,39.37 55.499,39.37 55.88,38.989 CN10.8@55.88,38.1 ; SB1.1@53.975,58.769 53.975,59.69 53.28,60.385 T2.1@52.07,60.385 T2.2@50.8,60.385 T2.3@49.53,60.385
  Bottom Layer w0.508: v2(38.735,64.135) 38.735,60.96 48.26,60.96 v2(49.53,62.23)
USB_CTRL: R11.2 U2.38 | length 19.4
  Top Layer w0.127: U2.38@26.38,66.48 26.38,67.31 26.761,67.691 31.115,67.691 v1(32.004,66.802) ; v1(42.799,66.04) 43.752,66.04 R11.2@43.815,66.103
  Bottom Layer w0.127: v1(32.004,66.802) 33.147,65.659 41.91,65.659 42.291,66.04 v1(42.799,66.04)
USB_DM: R18.2 U2.32 | length 10.4
  Top Layer w0.127: U2.32@28.38,62.98 36.691,62.98 37.465,63.754 R18.2@37.465,64.706
USB_DP: R17.2 U2.33 | length 8.8
  Top Layer w0.127: U2.33@28.38,63.48 35.794,63.48 36.195,63.881 R17.2@36.195,64.706
VBAT/VLCD: C29.1 CN7.33 SB45.2 U5.1 | length 39
  Top Layer w0.203: v1(3.175,6.35) v1(3.175,10.795) ; v1(10.16,13.335) 13.335,13.335 15.875,10.795 ; C29.1@15.875,9.588 15.875,10.795 ; U5.1@17.843,13.149 17.843,12.128 16.51,10.795 15.875,10.795
  Bottom Layer w0.203: CN7.33@-7.62,5.08 -7.62,4.064 -7.366,3.81 1.702,3.81 3.175,5.283 v1(3.175,6.35) ; v1(3.175,10.795) 8.255,10.795 10.16,12.7 v1(10.16,13.335) SB45.2@11.208,13.335
VDD: C23.1 C24.1 C27.1 C28.1 CN7.5 JP6.2 L1.1 R30.2 SB31.1 SB43.1 SB45.1 U5.32 U5.64 | length 117.7
  Top Layer w0.203: C27.1@12.7,15.176 13.906,15.176 v1(13.97,15.24) 14.034,15.304 U5.64@15.688,15.304 17.018,15.304 17.399,15.684 17.399,15.748 ; v2(17.399,16.129) 17.399,15.748 ; R30.2@24.828,45.085 26.924,45.085 27.559,44.45 v1(27.559,44.323) ; v1(30.988,16.383) 31.877,16.383 32.322,15.938 C28.1@32.322,15.24 L1.1@32.322,13.97 ; C24.1@31.718,25.4 30.988,25.4 30.226,24.638 30.226,23.813 29.21,22.797 U5.32@27.491,22.797 26.353,22.797 26.162,22.606 26.162,21.59 25.4,20.828 v1(25.4,20.447) 25.362,20.409 25.362,16.961 23.495,15.094 21.236,15.094 20.963,15.367 17.78,15.367 17.399,15.748
  Top Layer w0.508: v2(13.335,36.195) v2(15.875,36.195) JP6.2@22.225,36.195 ; v2(13.462,24.511) 14.605,25.654 v2(14.605,30.48) 14.668,30.544 C23.1@15.875,30.544 v2(15.875,32.766)
  Bottom Layer w0.203: SB45.1@12.922,13.335 13.335,13.335 13.97,13.97 v1(13.97,15.24) ; JP6.2@22.225,36.195 22.225,37.211 22.606,37.592 27.051,37.592 27.686,38.227 27.686,43.815 27.559,43.942 v1(27.559,44.323) ; v1(25.4,20.447) 25.4,20.151 28.914,16.637 30.254,16.637 30.508,16.383 v1(30.988,16.383) 31.369,16.383 31.75,16.764 33.623,16.764 33.877,16.51 SB43.1@33.877,15.875 SB43.1@33.623,15.875
  Bottom Layer w0.508: CN7.5@-7.62,40.64 -6.35,39.37 6.985,39.37 10.16,36.195 v2(13.335,36.195) ; v2(13.462,24.511) 13.462,21.844 17.399,17.907 v2(17.399,16.129) ; v2(14.605,30.48) 15.653,30.48 SB31.1@15.875,30.702 ; v2(15.875,32.766) v2(15.875,36.195)
VIN: C16.1 CN6.8 CN7.24 U3.3 | length 37.9
  Top Layer w0.635: v2(7.493,24.892) v2(8.509,24.892) 8.509,33.274 11.71,36.475 C16.1@11.71,38.735 11.723,38.722 12.967,38.722 13.411,38.278 U3.3@15.24,38.278
  Bottom Layer w0.635: CN7.24@-5.08,17.78 CN6.8@0,17.78 1.905,17.78 5.715,21.59 5.715,24.13 6.477,24.892 v2(8.509,24.892)
pads on no net: CN1.0 CN6.1 CN7.10 CN7.26 U2.4 U2.11 U2.14 U2.19 U2.22 U2.40 U2.41 U2.42 U2.43 U2.45 U2.46 U4.3 U4.5 U5.0 X2.2 X2.3

## Polygon pours and split planes (outlines as drawn)
GND on Bottom Layer "Top Layer-No Net 1" (solid, remove dead copper, pour order 2): -11.009,-4.973 -11.009,77.577 58.841,77.577 58.841,-4.973 -11.009,-4.973
GND on Top Layer "Top Layer-No Net" (solid, remove dead copper, pour order 3): -10.877,-5.127 -10.877,76.873 -10.877,77.873 59.123,77.873 59.123,-5.127 -10.877,-5.127
NetC17_1 on Top Layer "Top Layer-No Net 1" (solid, remove dead copper, pour order 6): 16.637,36.842 16.637,44.311 21.576,44.311 22.975,44.311 22.987,44.323 23.223,44.087 23.223,36.771 16.708,36.771 16.637,36.842

## Keep-outs
Keep-Out Layer:
  lines w0.127: 37.63,-3.04 35.63,-5.04 2.63,-5.04 0.63,-3.04 -8.87,-3.04 cw(c-8.87,-1.04) -10.87,-1.04 -10.87,51.96 4.63,51.96 ccw(c4.63,52.46) 4.63,52.96 -10.87,52.96 -10.87,75.46 cw(c-8.87,75.46) -8.87,77.46 57.13,77.46 cw(c57.13,75.46) 59.13,75.46 ; 37.63,-3.04 37.63,-3.04 ; 37.63,-3.04 57.13,-3.04 ccw(c57.13,-1.04) 59.13,-1.04 59.13,51.96 43.13,51.96 cw(c43.13,52.46) 43.13,52.96 59.13,52.96 59.13,75.46 ; 59.13,75.46 59.13,75.46 ; 8.13,51.96 cw(c8.13,52.46) 8.13,52.96 27.13,52.96 cw(c27.13,52.46) 27.13,51.96 8.13,51.96 ; 31.75,51.96 cw(c31.75,52.46) 31.75,52.96 39.08,52.96 cw(c39.08,52.46) 39.08,51.96 31.75,51.96

## Silkscreen, mask and mechanical layers (free items; w line width, h text height)
Top Overlay:
  lines w0.076: 1.524,-1.27 4.064,-1.27 4.064,2.946 4.064,8.128 ; 1.524,13.97 4.064,13.97 4.064,10.668 ; 1.524,16.51 5.334,16.51 5.334,20.574 ; 1.524,28.956 5.334,28.956 5.334,25.654 ; 17.018,10.414 17.018,11.176 18.542,11.176 ; 18.542,10.414 18.542,11.176 ; 19.812,10.414 19.812,11.176 ; 21.082,10.414 21.082,11.176 ; 26.416,11.176 18.542,11.176 ; 26.416,8.89 26.416,11.938 31.75,11.938 31.75,8.89 26.416,8.89
  lines w0.5: 8.89,66.815 9.652,66.815 9.652,70.231 8.89,70.231 8.89,66.815 ; 8.89,72.136 8.89,75.578 9.652,75.578 9.652,72.136 8.89,72.136
  lines w1: 13.797,67.096 13.797,70.144 14.369,70.144 14.369,67.096 13.797,67.096 ; 13.797,72.328 13.797,75.376 14.369,75.376 14.369,72.328 13.797,72.328
  text "GND" at 54.102,70.866 h1 r90
  text "SWD" at -3.81,70.358 h1
  text "USB PWR" at 29.718,69.596 h1 r90
  text "GND" at -8.89,68.326 h1
  text "NUCLEO" at 16.256,68.326 h1 r90
  text "ST-LINK" at 8.382,67.945 h1 r90
  text "COM" at 48.006,67.437 h1
  text "TX" at 2.794,57.15 h1
  text "RX" at 3.556,54.61 h1
  text "USER" at 6.604,50.038 h1
  text "RESET" at 38.608,50.038 h1
  text "MB1136" at -2.54,45.085 h1.5
  text "SCL/D15" at 40.894,44.196 h1.02
  text "rev C" at -2.54,43.18 h1.5
  text "E5V" at 30.734,41.402 h1 r90
  text "U5V" at 40.132,41.402 h1 r90
  text "SDA/D14" at 40.894,41.402 h1.02
  text "E5V" at -3.556,40.132 h1.02
  text "PWR" at 33.528,39.878 h1
  text "AVDD" at 42.926,38.862 h1.02
  text "GND" at -3.556,37.592 h1.02
  text "GND" at 43.942,36.322 h1.02
  text "SCK/D13" at 40.64,33.782 h1.02
  text "IDD" at 22.606,33.528 h1
  text "IOREF" at 1.524,32.512 h1.02
  text "MISO/D12" at 40.386,31.242 h1.02
  text "NRST" at 1.524,29.718 h1.02
  text "PWM/MOSI/D11" at 36.576,28.702 h1.02
  text "3V3" at 1.524,27.432 h1.02
  text "PWM/CS/D10" at 37.592,26.162 h1.02
  text "5V" at 1.524,24.638 h1.02
  text "PWM/D9" at 41.148,23.622 h1.02
  text "GND" at 1.524,22.098 h1.02
  text "D8" at 44.958,21.082 h1.02
  text "POWER" at 5.842,20.828 h1.02 r90
  text "GND" at 1.524,19.558 h1.02
  text "VIN" at 1.524,17.018 h1.02
  text "D7" at 44.958,17.018 h1.02
  text "PWM/D6" at 41.148,14.478 h1.02
  text "A0" at 1.524,11.938 h1.02
  text "PWM/D5" at 41.148,11.938 h1.02
  text "A1" at 1.524,9.398 h1.02
  text "D4" at 44.958,9.398 h1.02
  text "AIN" at 4.572,8.382 h1.02 r90
  text "A2" at 1.524,6.858 h1.02
  text "PWM/D3" at 41.148,6.858 h1.02
  text "A3" at 1.524,4.318 h1.02
  text "D2" at 44.958,4.318 h1.02
  text "A4" at 1.524,1.778 h1.02
  text "TX/D1" at 42.418,1.778 h1.02
  text "A5" at 1.524,-0.762 h1.02
  text "RX/D0" at 42.418,-0.762 h1.02
  text "www.st.com/stm32nucleo" at 4.445,-3.175 h1.5
Bottom Overlay:
  lines w0.076: 6.604,66.548 9.906,66.548 9.906,76.962 6.604,76.962 6.604,66.548 ; 12.7,66.548 12.7,76.962 16.256,76.962 16.256,66.548 12.7,66.548
  lines w0.127: 9.906,-3.683 9.906,1.016 27.686,1.016 27.686,-3.683 9.906,-3.683
  text "DEFAULT" at 6.35,74.93 h1 r90
  text "RESERVED" at 17.526,74.93 h1 r90
  text "RST" at 12.954,61.722 h1.02
  text "MCO" at 36.83,60.452 h1.02 r90
  text "NRST" at 23.876,58.928 h1.02 r90
  text "TX" at 26.67,56.134 h1.02 r90
  text "RX" at 27.94,56.134 h1.02 r90
  text "SWO" at 29.21,56.134 h1.02 r90
  text "B1-USER" at 9.652,42.672 h1.02
  text "LD2-LED" at 39.624,33.782 h1.02
  text "MCO" at 22.098,14.732 h1.02 r90
  text "SDA" at 4.572,2.032 h1.02
  text "MB1136 rev C" at 27.432,1.524 h1.5
  text "SCL" at 4.572,-0.508 h1.02
Mechanical 1:
  lines w0.127: 37.6,-3.04 57.13,-3.04 ccw(c57.13,-1.04) 59.13,-1.04 59.13,51.96 43.13,51.96 cw(c43.13,52.46) 43.13,52.96 59.13,52.96 59.13,75.46 ccw(c57.13,75.46) 57.13,77.46 -8.87,77.46 ccw(c-8.87,75.46) -10.87,75.46 -10.87,52.96 4.63,52.96 cw(c4.63,52.46) 4.63,51.96 -10.87,51.96 -10.87,-1.04 ccw(c-8.87,-1.04) -8.87,-3.04 0.5,-3.04 0.63,-3.04 2.63,-5.04 35.63,-5.04 ; 37.63,-3.04 35.63,-5.04 ; 35.63,-5.04 35.63,-5.04 ; 8.13,51.96 cw(c8.13,52.46) 8.13,52.96 27.13,52.96 cw(c27.13,52.46) 27.13,51.96 8.13,51.96 ; 31.75,51.96 cw(c31.75,52.46) 31.75,52.96 39.08,52.96 cw(c39.08,52.46) 39.08,51.96 31.75,51.96
  text "MB1136C" at -2.032,80.772 h1.52
Drill Drawing:
  lines w0.051: 61.722,13.36 91.44,13.36 ; 61.722,14.348 91.44,14.348 ; 60.198,8.077 ccw(c60.528,8.077) 60.528,7.747 92.634,7.747 ccw(c92.634,8.077) 92.964,8.077 92.964,15.799 ccw(c92.634,15.799) 92.634,16.129 60.528,16.129 ccw(c60.528,15.799) 60.198,15.799 60.198,8.077
  text ".legend" at 64.262,48.006 h1.02
  text "Layer Stack Up Detail for: Nucleo_64.PcbDoc" at 61.722,14.715 h0.69
  text "Layer" at 61.722,13.98 h0.23
  text "Gerber" at 68.096,13.98 h0.23
  text "Copper" at 71.244,13.98 h0.23
  text "Dielectric" at 74.767,13.98 h0.23
  text "Dielectric" at 78.449,13.98 h0.23
  text "Dielectric" at 83.172,13.98 h0.23
  text "Dielectric" at 86.854,13.98 h0.23
  text "Name" at 61.722,13.523 h0.23
  text "Document" at 68.096,13.523 h0.23
  text "Thickness" at 71.244,13.523 h0.23
  text "Height" at 74.767,13.523 h0.23
  text "Material" at 78.449,13.523 h0.23
  text "Constant" at 83.172,13.523 h0.23
  text "Type" at 86.854,13.523 h0.23
  text "Top Solder Mask" at 61.722,12.811 h0.33
  text "(.GTS)" at 68.096,12.811 h0.33
  text "0.4mil" at 74.767,12.811 h0.33
  text "Solder Resist" at 78.449,12.811 h0.33
  text "3.50" at 83.172,12.811 h0.33
  text "Top Layer" at 61.722,11.763 h0.33
  text "(.GTL)" at 68.096,11.763 h0.33
  text "1.4mil" at 71.244,11.763 h0.33
  text "59.055mil" at 74.767,11.239 h0.33
  text "FR-4" at 78.449,11.239 h0.33
  text "4.80" at 83.172,11.239 h0.33
  text "Core" at 86.854,11.239 h0.33
  text "Bottom Layer" at 61.722,10.716 h0.33
  text "(.GBL)" at 68.096,10.716 h0.33
  text "1.4mil" at 71.244,10.716 h0.33
  text "Bottom Solder Mask" at 61.722,9.668 h0.33
  text "(.GBS)" at 68.096,9.668 h0.33
  text "0.4mil" at 74.767,9.668 h0.33
  text "Solder Resist" at 78.449,9.668 h0.33
  text "3.50" at 83.172,9.668 h0.33
  text "Notes:" at 60.198,5.588 h1.02
  text "Silkscreen color : Blue ink PANTONE 2955" at 61.722,3.81 h0.89
  text "Solder resist color : White" at 61.722,2.286 h0.89
  text "Plating type : lead Gold" at 61.722,0.762 h0.89

## Dimensions
-8.87,77.46 to 2.63,-5.04 on Drill Drawing
-10.87,75.46 to 59.13,75.46 on Drill Drawing